# Altium PCB Radar_10GHz.PcbDoc
Units mil, origin at the board's own origin, x right, y up, seen from the top; angles counter-clockwise.
Board outline 1755 x 1945 mil, 2 copper layers (Top Layer, Bottom Layer); 11 components, 8 nets, 46 pads, 0 vias.
Unrouted connection lines stored in the file: 23.
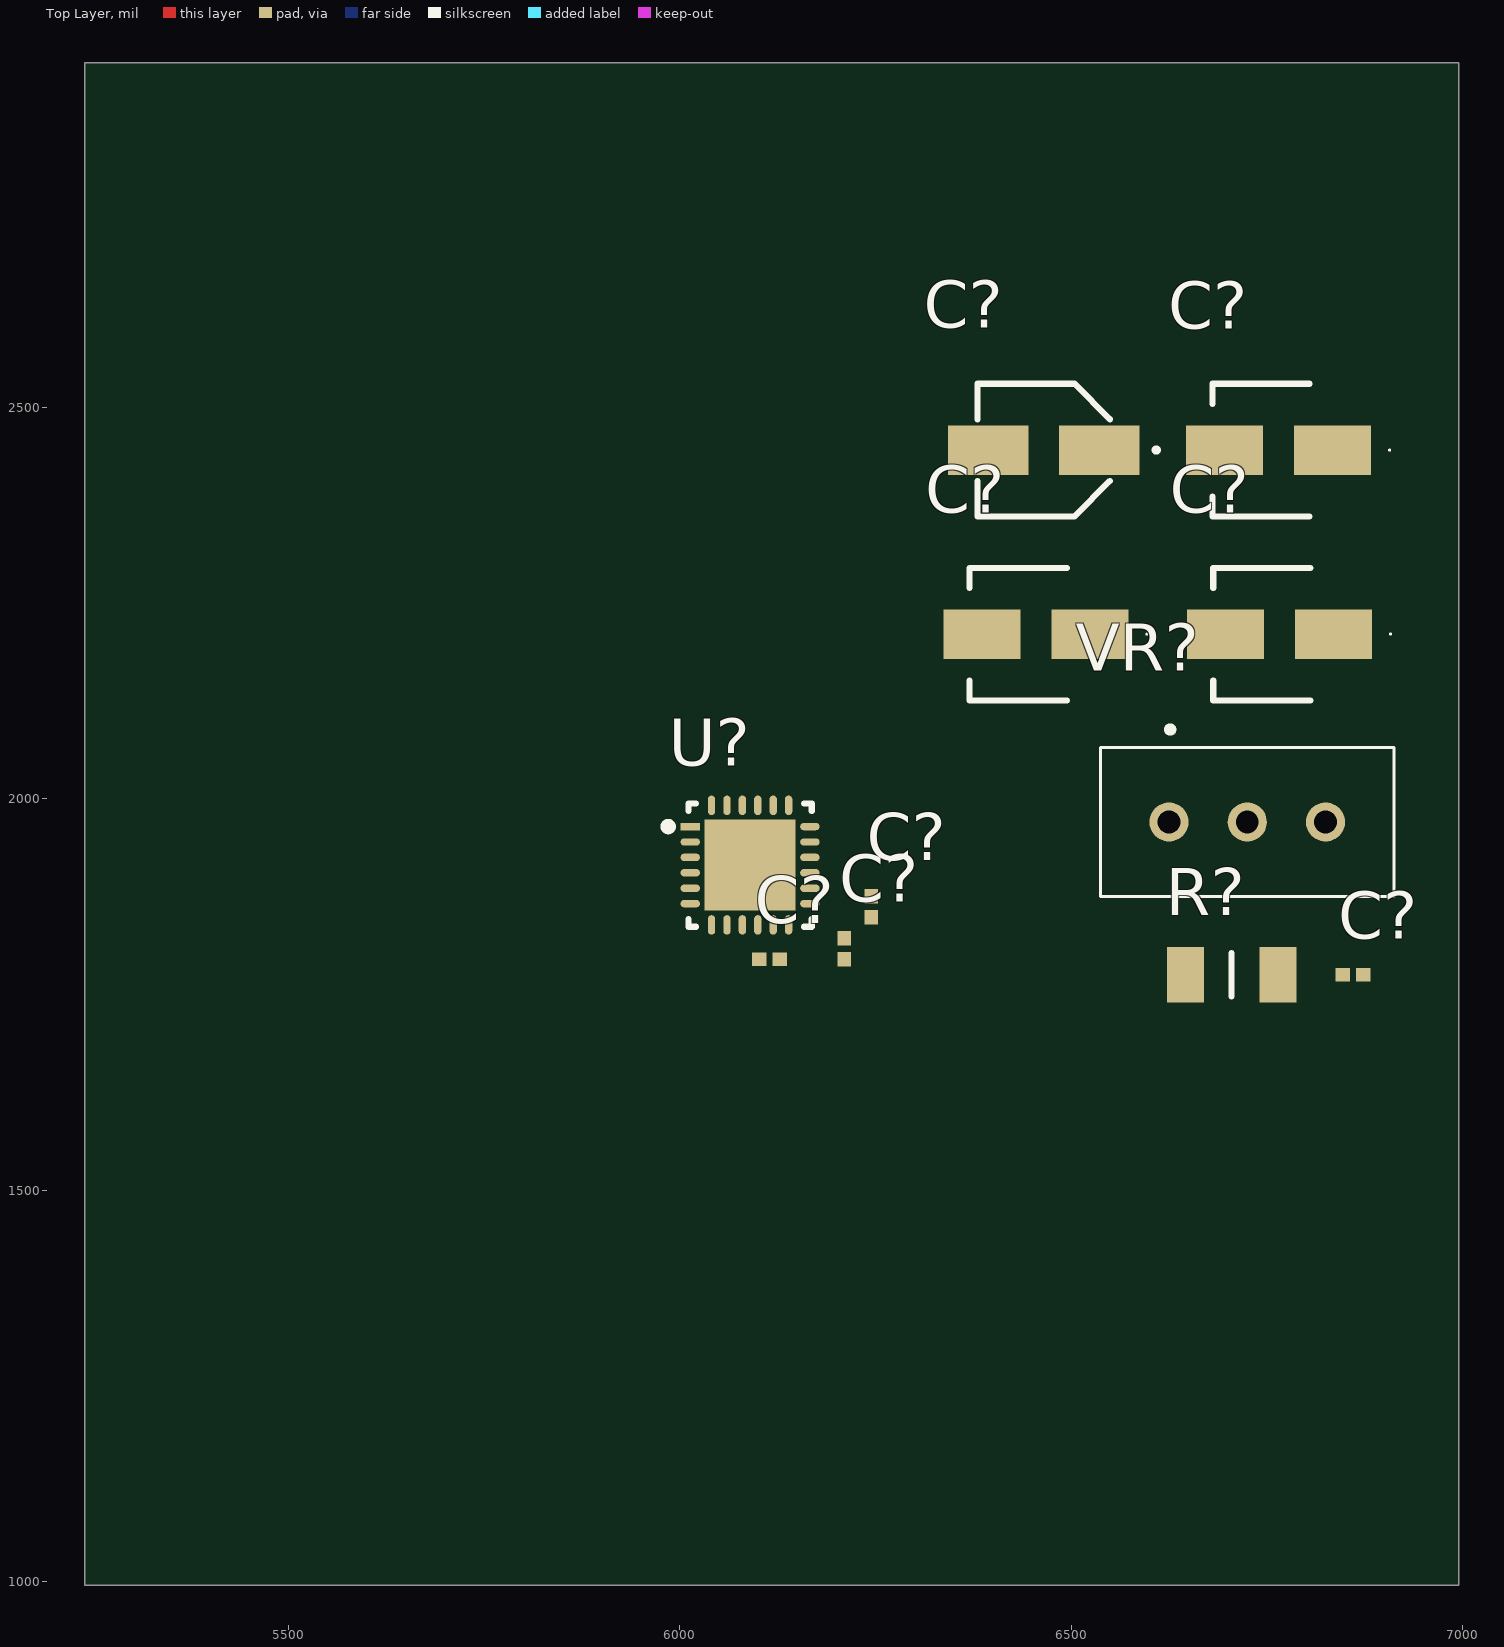
[diagram p0: Top Layer view]
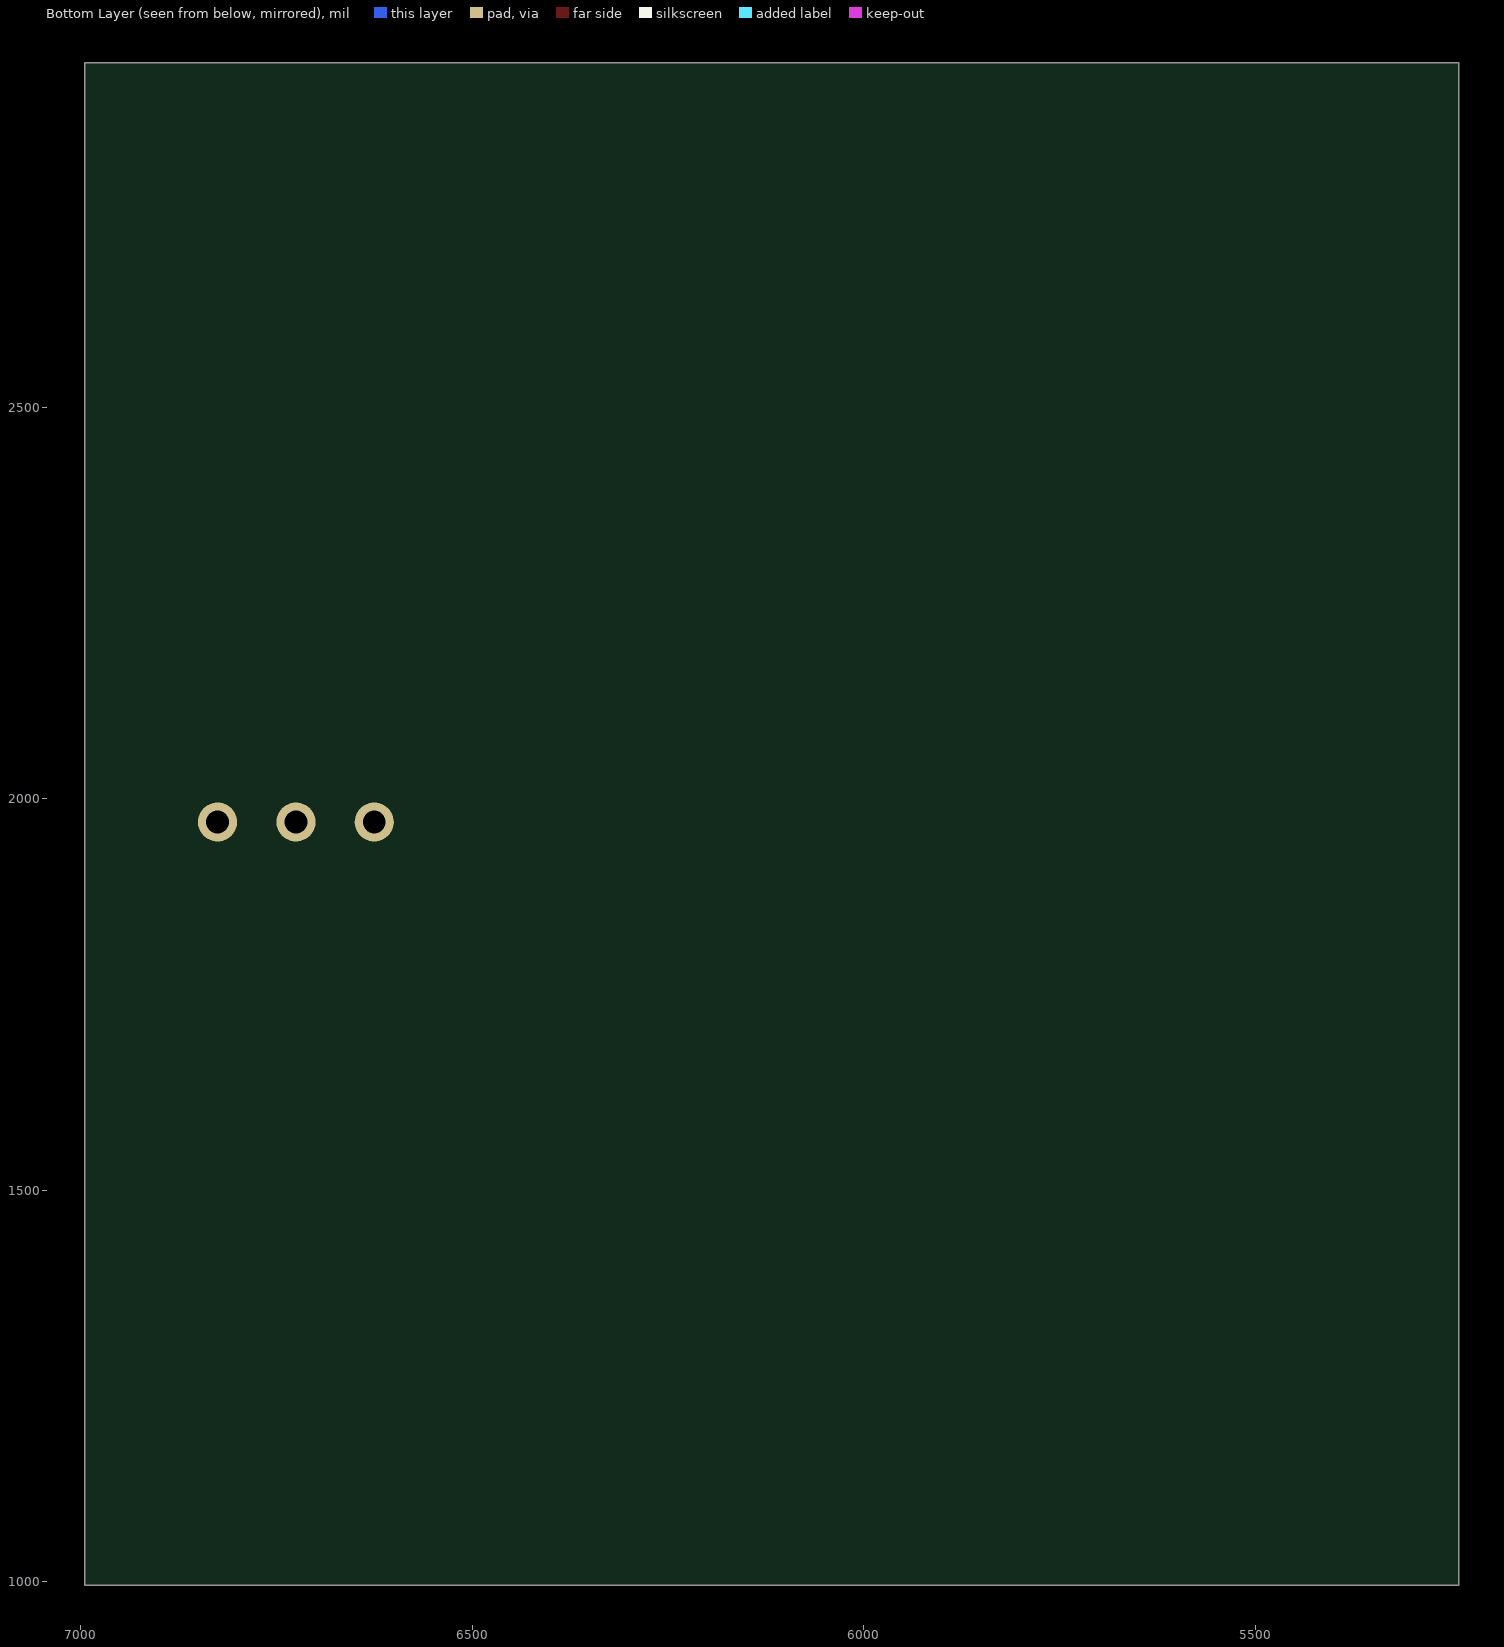
[diagram p1: Bottom Layer view, seen from below]

## Layer stack, top to bottom
Top Solder: solder mask 0.4, Solder Resist, Dk 3.5
Top Layer: signal copper 1.4
Dielectric 1: dielectric 12.6, FR-4, Dk 4.8
Bottom Layer: signal copper 1.4
Bottom Solder: solder mask 0.4, Solder Resist, Dk 3.5

## Board outline
5240,995 5240,2940 6995,2940 6995,995

## Design rules (kind name [scope] priority, off if disabled: settings)
Clearance [All] p1: gap=10 ignorepadtopadclearanceinfootprint=FALSE
PolygonConnect [All] p1: connectstyle=Relief reliefconductorwidth=10 reliefentries=4 polygonreliefangle="90 Angle" airgapwidth=10
RoutingVias [All] p1: holewidth=28 width=50 viastyle="Through Hole" minholewidth=28 minwidth=50 maxholewidth=28 maxwidth=50
SolderMaskExpansion [All] p1: expansion=4 istentingtop=FALSE
Width [All] p1: maxlimit=10 minlimit=10 preferedwidth=10
30 further rules are at their usual default settings.

## Classes and differential pairs
component class Radar_10GHz: C? R? U? VR?

## Components (designator, comment, footprint, x,y, rotation, side; value= is the part's Value field where it differs from the comment)
C? "10SVP4R7M" 10SVPS10M 6465,2445 r180 top
C? "02013A101GAT2A" CAPC0603X33N 6860,1775 r0 top
C? "EEE-FK1H4R7R" EEE1AA220WR 6455,2210 r180 top
C? "02013A101GAT2A" CAPC0603X33N 6210,1808.19 r90 top
C? "EEE-FK1H4R7R" EEE1AA220WR 6765,2445 r180 top
C? "02013A101GAT2A" CAPC0603X33N 6245,1861.81 r90 top
C? "EEE-FK1H4R7R" EEE1AA220WR 6766.1,2210 r180 top
C? "02013C102JAT2A" CAPC0603X33N 6115,1795 r180 top
R? "CR1206-FX-7500ELF" RESC3216X75N 6705,1775 r0 top
U? "HMC739LP4E" FP-HCP-24-2-IPC_C 6090,1915 r0 top
VR? "3296X-1-501RLF" 3296X1223LF 6725,1970 r270 top

## Footprints (in the part's own frame and the unit in brackets; to place one, negate y for a bottom-side part, rotate by r counter-clockwise, add the part's x,y. Pads: shape width x height; smd on the part's side, far side on the other; paste and mask are expansions set on the pad)
10SVPS10M [mm]
  rect 2.6x1.6 smd: 1(-1.8,0) 2(1.8,0)
  silkscreen extent -3.7,-2.15 2.15,2.15, body extent -2.5,-2.15 2.5,2.15, height 5.4
3296X1223LF [mm]
  round 1.269 hole 0.74: 1(0,-2.54) 2(0,0) 3(0,2.54)
  silkscreen extent -3.1,-4.76 2.41,4.76, body extent -2,-4.8 2.83,6.25, height 10.03
CAPC0603X33N [mm]
  rect 0.47x0.44 smd: 1(-0.335,0) 2(0.335,0)
  body extent -0.3,-0.15 0.3,0.15, height 0.33
EEE1AA220WR [mm]
  rect 2.5x1.6 smd: 1(-1.75,0) 2(1.75,0)
  silkscreen extent -3.63,-2.15 2.15,2.15, body extent -2.5,-2.15 2.5,2.15, height 5.78
FP-HCP-24-2-IPC_C [mm]
  rect 0.631x0.239 smd paste+0 mask+0: 1(-1.941,1.25)
  rrect100% 0.631x0.239 smd paste+0 mask+0: 2(-1.941,0.75) 3(-1.941,0.25) 4(-1.941,-0.25) 5(-1.941,-0.75) 6(-1.941,-1.25) 13(1.941,-1.25) 14(1.941,-0.75) 15(1.941,-0.25) 16(1.941,0.25) 17(1.941,0.75) 18(1.941,1.25)
  rrect100% 0.239x0.631 smd paste+0 mask+0: 7(-1.25,-1.941) 8(-0.75,-1.941) 9(-0.25,-1.941) 10(0.25,-1.941) 11(0.75,-1.941) 12(1.25,-1.941) 19(1.25,1.941) 20(0.75,1.941) 21(0.25,1.941) 22(-0.25,1.941) 23(-0.75,1.941) 24(-1.25,1.941)
  rect 2.95x2.95 smd paste-1000 mask+0: 25(0,0)
  silkscreen extent -2.78,-2 2,2, body extent -2.36,-2.36 2.36,2.36, height 0.25
RESC3216X75N [mm]
  rect 1.2x1.8 smd: 1(-1.5,0) 2(1.5,0)
  silkscreen extent 0,-0.7 0,0.7, body extent -1.6,-0.8 1.6,0.8, height 0.75

## Part data
C?: "Capacitor Polarised", Manufacturer_Name=Panasonic, Mouser Part Number=667-10SVP4R7M, Arrow Part Number=10SVP4R7M, Arrow Price/Stock=https://www.arrow.com/en/products/10svp4r7m/panasonic, Datasheet Link=http://industrial.panasonic.com/cdbs/www-data/pdf/AAB8000/AAB8000C193.pdf, Height=5.5mm, Manufacturer_Part_Number=10SVP4R7M, Mouser Price/Stock=https://www.mouser.co.uk/ProductDetail/Panasonic/10SVP4R7M?qs=OE1iw1LrrPGNT%2FyEeV%2FacA%3D%3D
C? C? C?: "Capacitor", Manufacturer_Name="Kyocera AVX", Mouser Part Number=581-02013A101GAT2A, Datasheet Link=http://www.mouser.com/catalog/supplier/library/pdf/AVXSurfaceMountCeramic.pdf, Height=0.33mm, Manufacturer_Part_Number=02013A101GAT2A, Mouser Price/Stock=https://www.mouser.co.uk/ProductDetail/KYOCERA-AVX/02013A101GAT2A?qs=f21FSZc47PgIfVZWxI2rdg%3D%3D
C? C? C?: "Capacitor Polarised", Manufacturer_Name=Panasonic, Mouser Part Number=667-EEE-FK1H4R7R, Arrow Part Number=EEE-FK1H4R7R, Arrow Price/Stock=https://www.arrow.com/en/products/eee-fk1h4r7r/panasonic?region=europe, Datasheet Link=http://industrial.panasonic.com/cdbs/www-data/pdf/RDE0000/ABA0000C1181.pdf, Height=5.5mm, Manufacturer_Part_Number=EEE-FK1H4R7R, Mouser Price/Stock=https://www.mouser.co.uk/ProductDetail/Panasonic/EEE-FK1H4R7R?qs=qE6bgDGEOCur97rwuEUvdw%3D%3D
C?: "Capacitor", Manufacturer_Name="Kyocera AVX", Mouser Part Number=581-02013C102JAT2A, Arrow Part Number=02013C102JAT2A, Arrow Price/Stock=https://www.arrow.com/en/products/02013c102jat2a/avx, Datasheet Link=http://www.mouser.com/catalog/supplier/library/pdf/AVXSurfaceMountCeramic.pdf, Height=0.33mm, Manufacturer_Part_Number=02013C102JAT2A, Mouser Price/Stock=https://www.mouser.co.uk/ProductDetail/AVX/02013C102JAT2A?qs=zKeCUPC1TQ0744pweOVFqQ%3D%3D
R?: "Resistor", Manufacturer_Name=Bourns, Mouser Part Number=652-CR1206FX-7500ELF, Arrow Part Number=CR1206-FX-7500ELF, Arrow Price/Stock=https://www.arrow.com/en/products/cr1206-fx-7500elf/bourns?region=nac, Datasheet Link=http://www.bourns.com/data/global/pdfs/CHPREZTR.pdf, Height=0.75mm, Manufacturer_Part_Number=CR1206-FX-7500ELF, Mouser Price/Stock=https://www.mouser.co.uk/ProductDetail/Bourns/CR1206-FX-7500ELF?qs=x5wsLs3ZZ80RF%252BfrW3ztLA%3D%3D
U?: library part CMP-09141-000339-1, "IC MMIC VCO HBT HALF FREQ 24-QFN", Case/Package=QFN, Frequency=26.8GHz, Max Operating Temperature=85°C, Max Supply Voltage=5.25V, Min Operating Temperature=-40°C, Min Supply Voltage=4.75V, Operating Supply Voltage=5V, Package Quantity=50, Lead Free="Contains Lead", Mount="Surface Mount", Number of Pins=24, Packaging=Strip, Reach SVHC Compliant=Yes, RoHS Compliant=Yes, Series=-, Termination=SMD/SMT
VR?: "Variable Resistor", Manufacturer_Name=Bourns, Mouser Part Number=652-3296X-1-501RLF, Datasheet Link=https://www.bourns.com/pdfs/3296.pdf, Height=10mm, Manufacturer_Part_Number=3296X-1-501RLF, Mouser Price/Stock=https://www.mouser.co.uk/ProductDetail/Bourns/3296X-1-501RLF?qs=pxDZlBjcsCiC1uib8I6u%2FA%3D%3D

## Nets (pads, with @x,y where several pads share a name; then routed paths per layer and width w, separated by ;. In a path a pad name is that pad's centre, name@x,y a point inside that pad or via, vN(x,y) a via of type N, cw(c..) or ccw(c..) an arc to the next point about the centre after c; other vN are vias at no path point)
GND: C?.1@6210,1795 C?.1@6245,1848.62 C?.1@6846.81,1775 C?.2@6386.1,2210 C?.2@6394.13,2445 C?.2@6696.1,2445 C?.2@6697.2,2210 U?.11 U?.15 U?.17 U?.25 VR?.1
NetC?_1: C?.1@6128.19,1795 U?.2
NetR?_1: R?.1 VR?.3
RFOUT: U?.16
RFOUT/2: U?.10
RFOUT/16: C?.2@6101.81,1795
VCC(DIG): C?.1@6523.9,2210 C?.1@6833.9,2445 C?.1@6835,2210 C?.2@6210,1821.38 C?.2@6245,1875 C?.2@6873.19,1775 R?.2 U?.4 U?.20
VTUNE: C?.1@6535.87,2445 U?.22 VR?.2
pads on no net: U?.1 U?.3 U?.5 U?.6 U?.7 U?.8 U?.9 U?.12 U?.13 U?.14 U?.18 U?.19 U?.21 U?.23 U?.24